# Altium PCB BLDCMOTORCONTROLLER.PcbDoc
Units mil, origin at the board's own origin, x right, y up, seen from the top; angles counter-clockwise.
Board outline 3645 x 3720 mil, 2 copper layers (Top Layer, Bottom Layer); 68 components, 47 nets, 204 pads, 0 vias.
Unrouted connection lines stored in the file: 127.
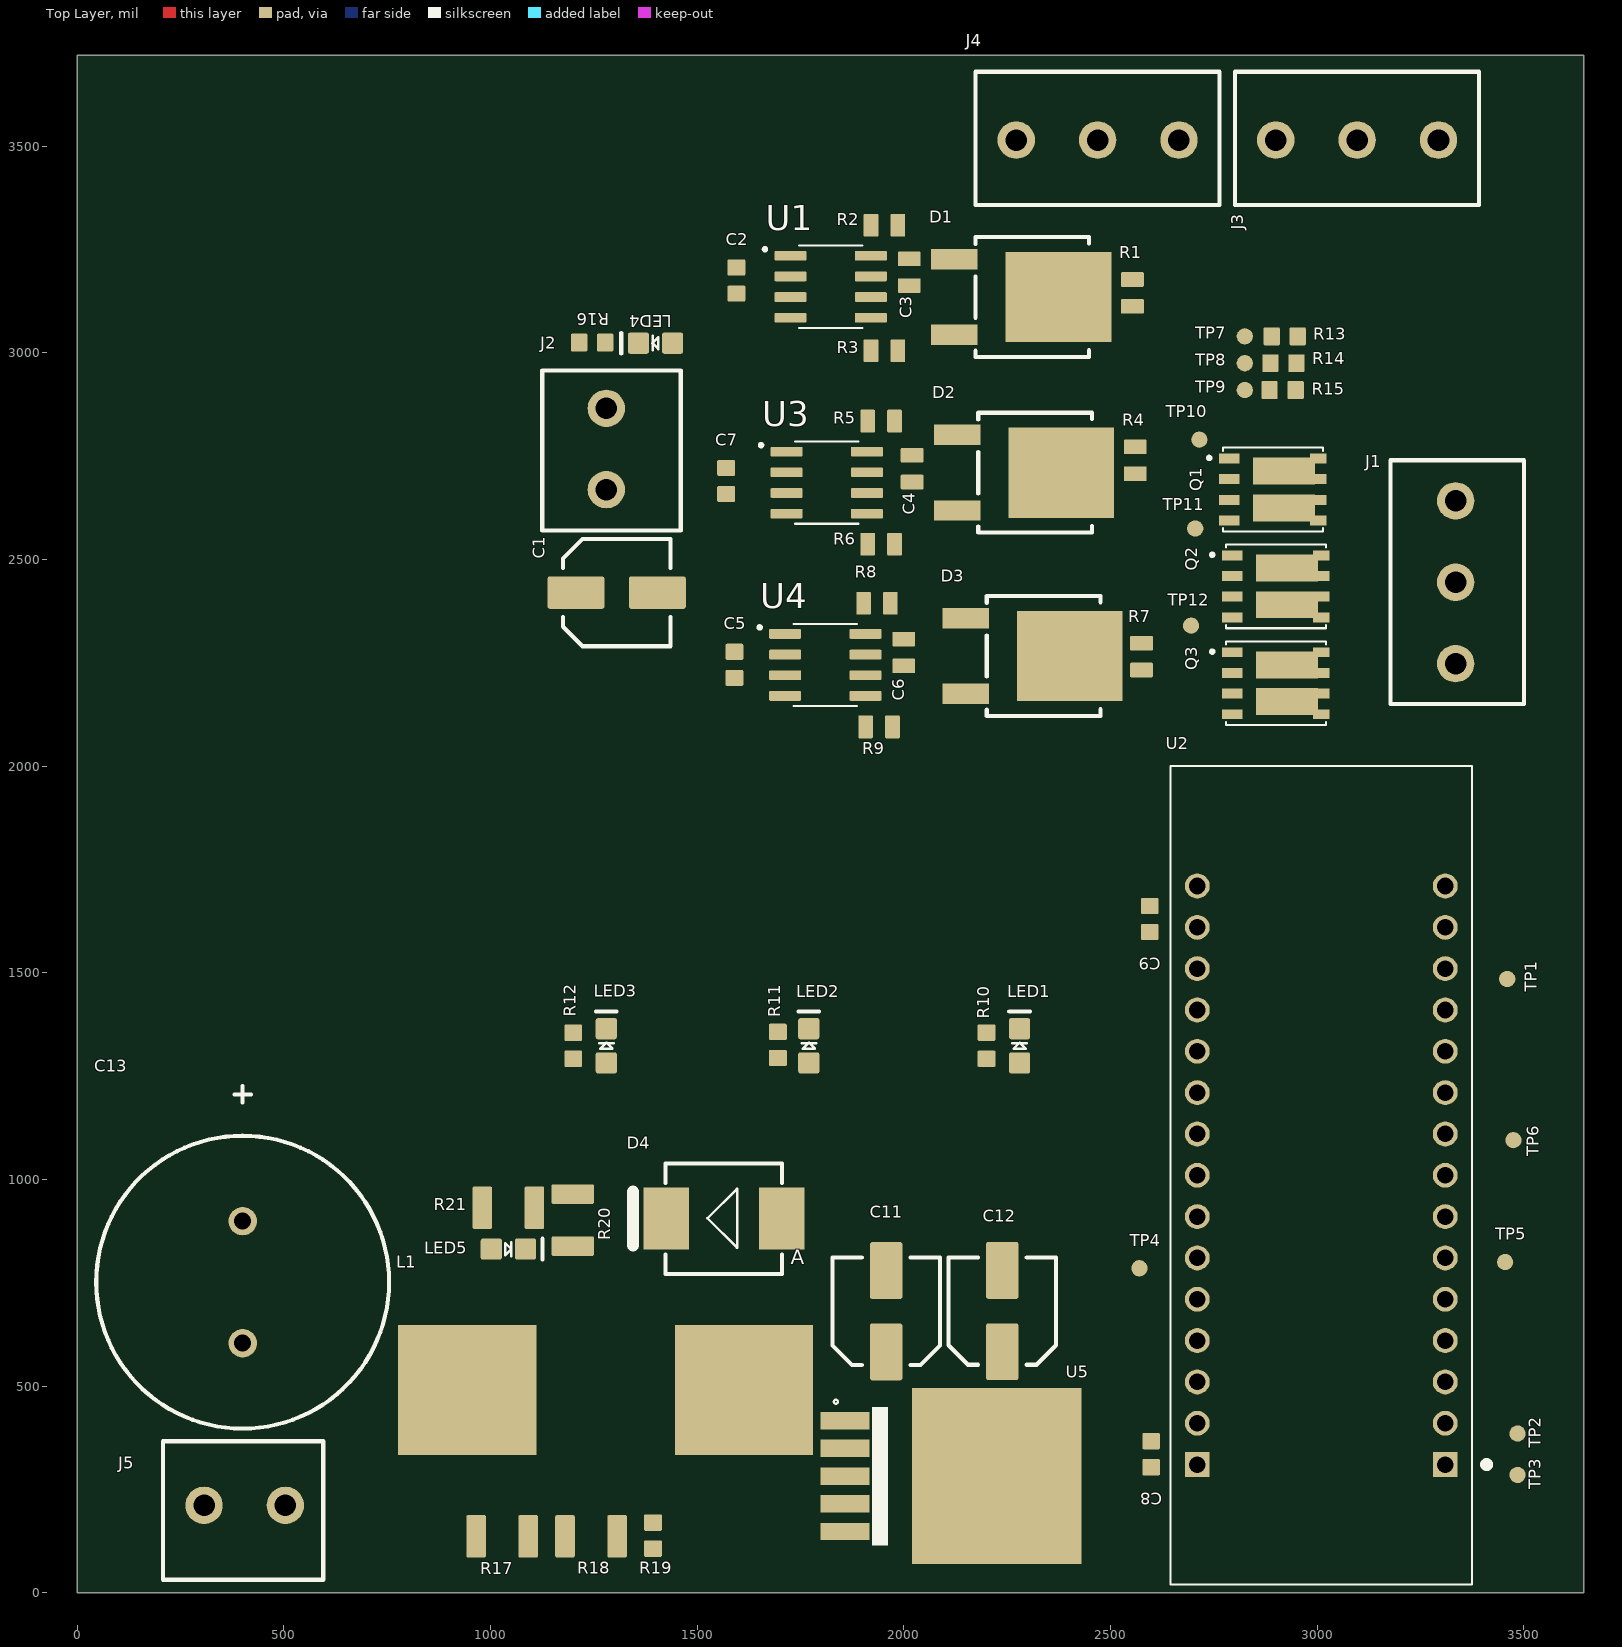
[diagram p0: Top Layer view]
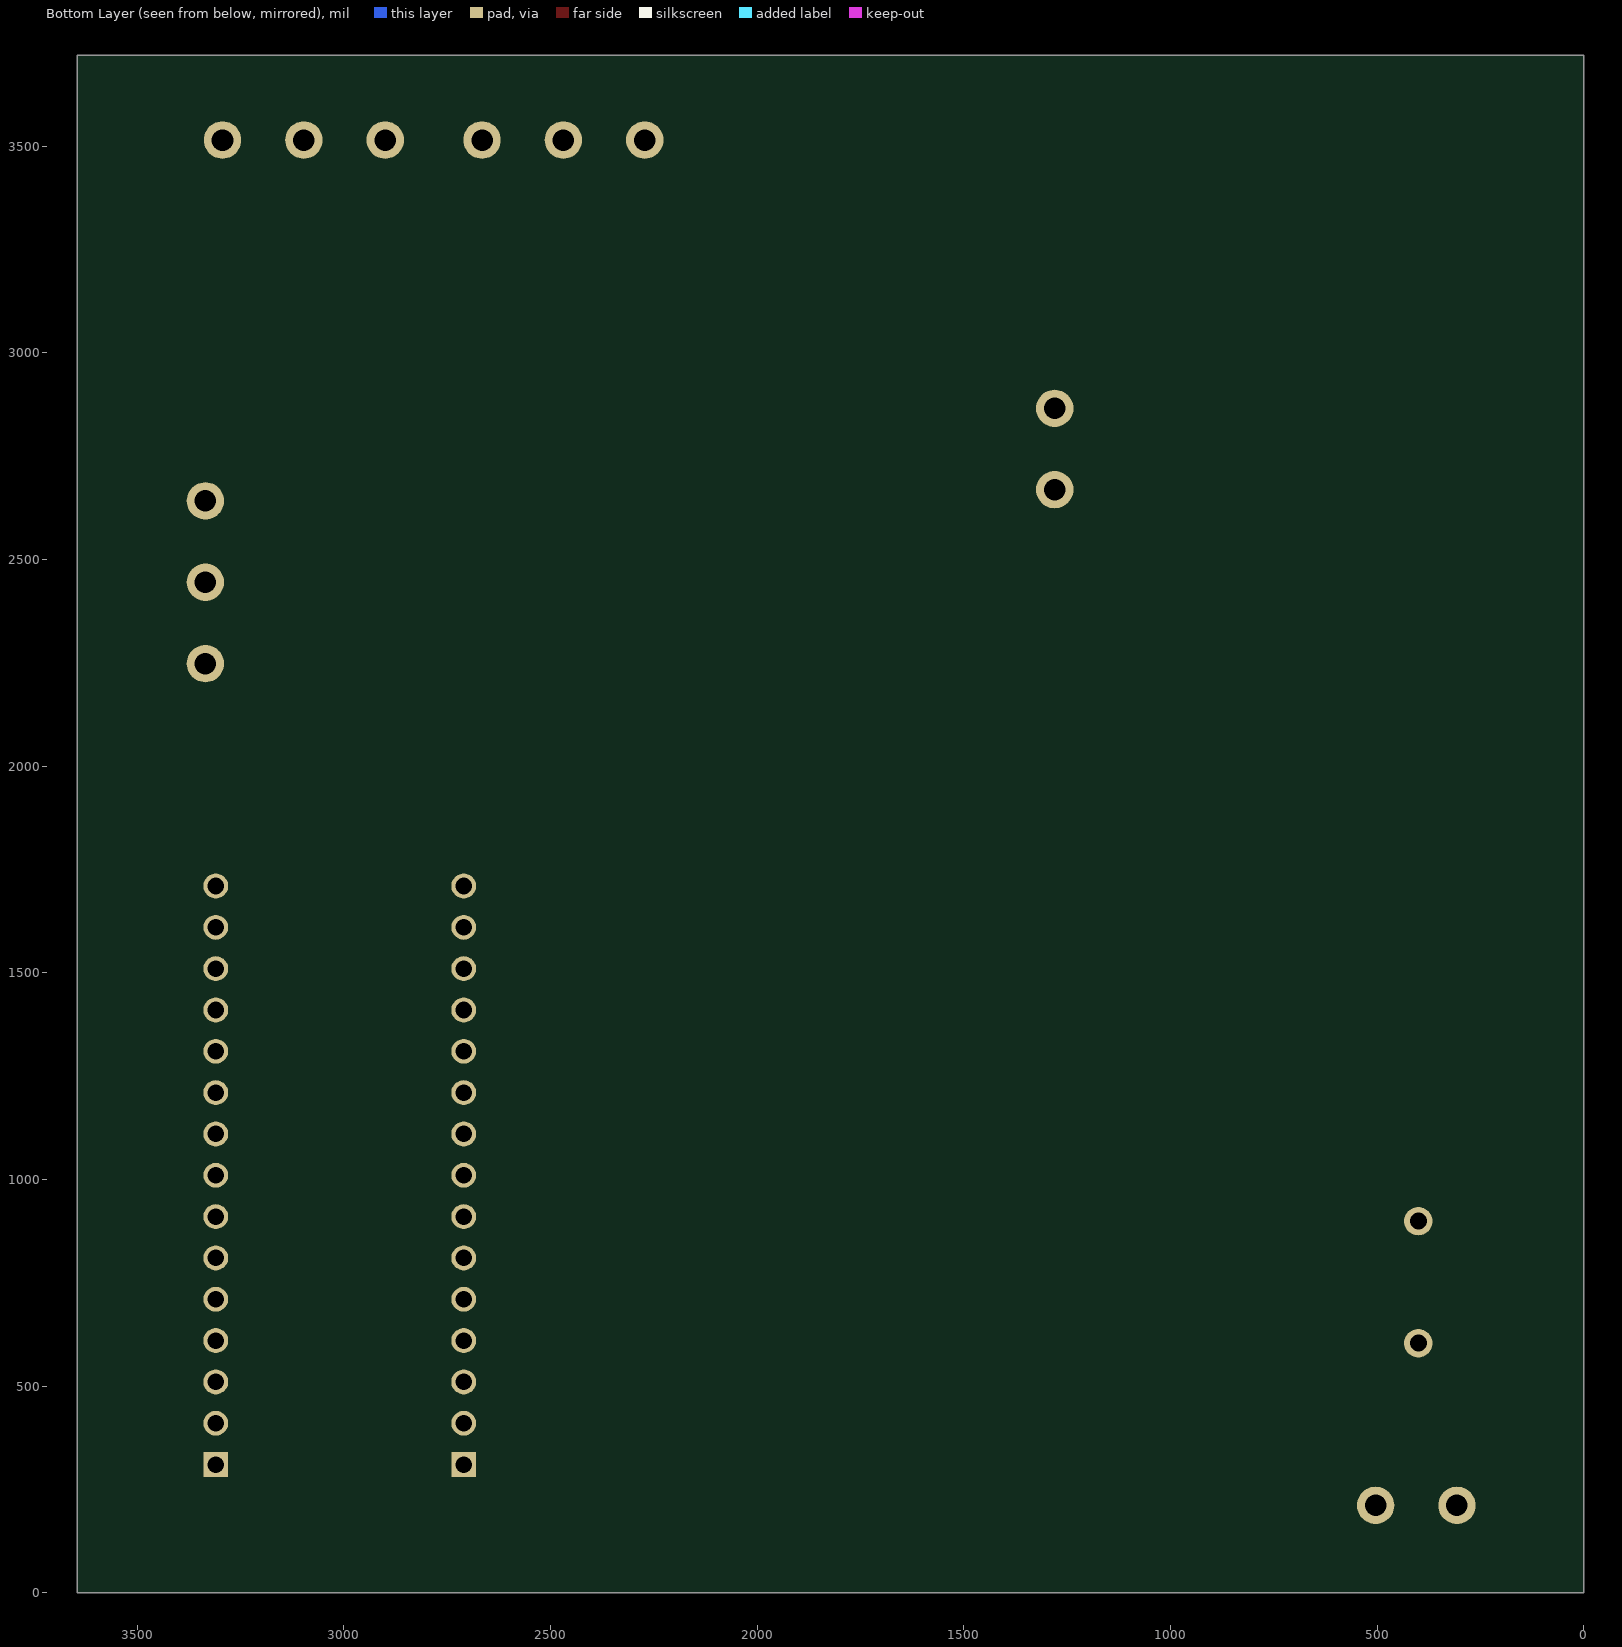
[diagram p1: Bottom Layer view, seen from below]

## Layer stack, top to bottom
Top Solder: solder mask 0.4, Solder Resist, Dk 3.5
Top Layer: signal copper 1.4
Dielectric 1: dielectric 12.6, FR-4, Dk 4.8
Bottom Layer: signal copper 1.4
Bottom Solder: solder mask 0.4, Solder Resist, Dk 3.5

## Board outline
0,0 3645,0 3645,3720 0,3720

## Design rules (kind name [scope] priority, off if disabled: settings)
Clearance [All] p1: gap=10 ignorepadtopadclearanceinfootprint=FALSE except(0: Arc-Hole Track-Hole SMDPad-Hole THPad-Hole Via-Hole Fill-Hole Poly-Hole Region-Hole Text-Hole)
PolygonConnect [All] p1: connectstyle=Relief reliefconductorwidth=10 reliefentries=4 polygonreliefangle="90 Angle" airgapwidth=10
RoomDefinition MCU [InComponentClass('MCU')] p1: confinementstyle=ConfineIn formatcopy=TRUE lockcomponents=FALSE outline 3560,5 3560,2025 2500,2025 2500,5
RoomDefinition Main [InComponentClass('Main')] p2: confinementstyle=ConfineIn formatcopy=TRUE lockcomponents=FALSE outline 1065,2015 3640,2015 3640,3715 1065,3715
RoomDefinition LEDs [InComponentClass('LEDs')] p3: confinementstyle=ConfineIn formatcopy=TRUE lockcomponents=FALSE outline 1020,1243.35 2480,1243.35 2480,1518.35 1020,1518.35
RoomDefinition Buck [InComponentClass('Buck')] p4: confinementstyle=ConfineIn formatcopy=TRUE lockcomponents=FALSE outline 0.04,6.4 2483.03,6.4 2483.03,1236.4 0.04,1236.4
RoutingVias [All] p1: holewidth=28 width=50 viastyle="Through Hole" minholewidth=28 minwidth=50 maxholewidth=28 maxwidth=50
SolderMaskExpansion [All] p1: expansion=4 istentingtop=FALSE
Width [All] p1: maxlimit=10 minlimit=10 preferedwidth=10
30 further rules are at their usual default settings.

## Classes and differential pairs
net class HI: GND "PHASE A" "PHASE B" "PHASE C" VBUS
component class MCU: C8 C9 TP1 TP2 TP3 TP4 TP5 TP6 U2
component class Main: C1 C2 C3 C4 C5 C6 C7 D1 D2 D3 J1 J2 J3 J4 LED4 Q1 Q2 Q3 R1 R2 R3 R4 R5 R6 R7 R8 R9 R13 R14 R15 R16 TP7 TP8 TP9 TP10 TP11 TP12 U1 U3 U4
component class LEDs: LED1 LED2 LED3 R10 R11 R12
component class Buck: C11 C12 C13 D4 J5 L1 LED5 R17 R18 R19 R20 R21 U5

## Components (designator, comment, footprint, x,y, rotation, side; value= is the part's Value field where it differs from the comment)
C1 "CAP_47uF_100V_ALUM" RADIAL_CORNELL_D 1305,2420 r270 top
C2 "CAP_1uF_50V_0603" CAP0603 1595,3175 r90 top value=1μF
C3 "CAP_0.1uF_100V_0805" CAP0805 2013.01,3195 r90 top value=0.1µF
C4 "CAP_0.1uF_100V_0805" CAP0805 2020,2720 r90 top value=0.1µF
C5 "CAP_1uF_50V_0603" CAP0603 1590,2245 r90 top value=1μF
C6 "CAP_0.1uF_100V_0805" CAP0805 2000,2275 r90 top value=0.1µF
C7 "CAP_1uF_50V_0603" CAP0603 1570,2690 r90 top value=1μF
C8 "CAP_0.1uF_50V_0603" CAP0603 2598.55,335 r270 top value=0.1μF
C9 "CAP_0.1uF_50V_0603" CAP0603 2595,1630 r270 top value=0.1μF
C11 "CAP_47uF_100V_ALUM" RADIAL_CORNELL_D 1957.18,681.09 r0 top
C12 "CAP_47uF_100V_ALUM" RADIAL_CORNELL_D 2238.18,681.4 r0 top
C13 "CAP_680uF_63V_ALUM" ELXZ630ELL681MM20S 400.04,751.4 r90 top value=680uF
D1 "DIO_SCHOTTKY_100V_5.5A" D-PAK 2248.01,3135 r270 top
D2 "DIO_SCHOTTKY_100V_5.5A" D-PAK 2255,2710 r270 top
D3 "DIO_SCHOTTKY_100V_5.5A" D-PAK 2275.49,2266.54 r270 top
D4 "DIO_SCHOTTKY_20V_3A" SS32 1565.04,905 r0 top
J1 "CON_3POS_SCREW_TERM" 1935174 3335,2445 r270 top
J2 "CON_2POS_SCREW_TERM" 1935161 1280,2767.36 r90 top
J3 "CON_3POS_SCREW_TERM" 1935174 3096.85,3515 r0 top
J4 "CON_3POS_SCREW_TERM" 1935174 2468.85,3515 r0 top
J5 "CON_2POS_SCREW_TERM" 1935161 405.04,211.4 r0 top
L1 "IND_330uH_6.1A" 74437529203331 1613.03,490.63 r180 top
LED1 "LED_YELLOW" LED_0805_YELLOW 2280,1323.35 r90 top
LED2 "LED_YELLOW" LED_0805_YELLOW 1770,1323.35 r90 top
LED3 "LED_YELLOW" LED_0805_YELLOW 1280,1323.35 r90 top
LED4 "LED_RED" LED_0805_RED 1399.02,3023.46 r180 top
LED5 "LED_RED" LED_0805_RED 1043.03,831.4 r0 top
Q1 "NMOS_2CH_60V_63A" "PowerPAK 8 x 8 Dual" 2892.83,2669.49 r0 top
Q2 "NMOS_2CH_60V_63A" "PowerPAK 8 x 8 Dual" 2900.12,2435.07 r0 top
Q3 "NMOS_2CH_60V_63A" "PowerPAK 8 x 8 Dual" 2900.12,2200.65 r0 top
R1 "RES_5.1Ω_0805_5%" RES0805 2553.01,3145 r270 top value=5.1Ω
R2 "RES_5.1Ω_0805_5%" RES0805 1953.01,3308.95 r0 top value=5.1Ω
R3 "RES_5.1Ω_0805_5%" RES0805 1953.01,3005 r0 top value=5.1Ω
R4 "RES_5.1Ω_0805_5%" RES0805 2560,2740 r270 top value=5.1Ω
R5 "RES_5.1Ω_0805_5%" RES0805 1945,2835 r0 top value=5.1Ω
R6 "RES_5.1Ω_0805_5%" RES0805 1945,2537.03 r0 top value=5.1Ω
R7 "RES_5.1Ω_0805_5%" RES0805 2575,2265 r270 top value=5.1Ω
R8 "RES_5.1Ω_0805_5%" RES0805 1935,2393.95 r0 top value=5.1Ω
R9 "RES_5.1Ω_0805_5%" RES0805 1940,2095 r0 top value=5.1Ω
R10 "RES_510Ω_0603_5%" RES0603 2200,1355 r270 top value=510Ω
R11 "RES_510Ω_0603_5%" RES0603 1695,1357.01 r270 top value=510Ω
R12 "RES_510Ω_0603_5%" RES0603 1200,1355 r270 top value=510Ω
R13 "RES_10kΩ_0603_5%" RES0603 2890,3040 r0 top value=10kΩ
R14 "RES_10kΩ_0603_5%" RES0603 2887.01,2975 r0 top value=10kΩ
R15 "RES_10kΩ_0603_5%" RES0603 2885,2910 r0 top value=10kΩ
R16 "RES_20kΩ_0603_1%" RES0603 1214.33,3025 r0 top value=20kΩ
R17 "RES_4.3kΩ_1210_5%" RES1210 1028.03,136.4 r180 top value=4.3kΩ
R18 "RES_4.3kΩ_1210_5%" RES1210 1243.03,136.4 r180 top value=4.3kΩ
R19 "RES_1kΩ_0603_5%" RES0603 1393.03,106.4 r90 top value=1kΩ
R20 "RES_4.3kΩ_1210_5%" RES1210 1198.84,901.4 r270 top value=4.3kΩ
R21 "RES_4.3kΩ_1210_5%" RES1210 1043.03,931.4 r0 top value=4.3kΩ
TP1 "TESTPOINT_1MM_CIRCLE" TESTPOINT_CIRCLE_1MM 3460,1485 r180 top
TP2 "TESTPOINT_1MM_CIRCLE" TESTPOINT_CIRCLE_1MM 3485,385 r180 top
TP3 "TESTPOINT_1MM_CIRCLE" TESTPOINT_CIRCLE_1MM 3485,285 r180 top
TP4 "TESTPOINT_1MM_CIRCLE" TESTPOINT_CIRCLE_1MM 2570,785 r180 top
TP5 "TESTPOINT_1MM_CIRCLE" TESTPOINT_CIRCLE_1MM 3455,800 r180 top
TP6 "TESTPOINT_1MM_CIRCLE" TESTPOINT_CIRCLE_1MM 3475,1095 r180 top
TP7 "TESTPOINT_1MM_CIRCLE" TESTPOINT_CIRCLE_1MM 2825,3040 r180 top
TP8 "TESTPOINT_1MM_CIRCLE" TESTPOINT_CIRCLE_1MM 2825,2975 r180 top
TP9 "TESTPOINT_1MM_CIRCLE" TESTPOINT_CIRCLE_1MM 2825,2910 r180 top
TP10 "TESTPOINT_1MM_CIRCLE" TESTPOINT_CIRCLE_1MM 2715,2790 r90 top
TP11 "TESTPOINT_1MM_CIRCLE" TESTPOINT_CIRCLE_1MM 2705,2575 r180 top
TP12 "TESTPOINT_1MM_CIRCLE" TESTPOINT_CIRCLE_1MM 2695,2340 r315 top
U1 "LM5109BMAX/NOPBCT-ND" SOIC127P599X175-8N 1823.01,3160 r0 top
U2 "STM32F042K6 NUCLEO" NUCLEO-F042K6 3010,1010 r180 top
U3 "LM5109BMAX/NOPBCT-ND" SOIC127P599X175-8N 1813.46,2685.98 r0 top
U4 "LM5109BMAX/NOPBCT-ND" SOIC127P599X175-8N 1810,2245 r0 top
U5 "BUCK_ADJ_4_57_V" D2PAK-5 2035.42,282.07 r0 top

## Footprints (in the part's own frame and the unit in brackets; to place one, negate y for a bottom-side part, rotate by r counter-clockwise, add the part's x,y. Pads: shape width x height; smd on the part's side, far side on the other; paste and mask are expansions set on the pad)
1935161 [mm] "TERM BLK 2POS SIDE ENTRY 5MM PCB"
  round 2.3 hole 1.325: 1(-2.5,0) 2(2.5,0)
  silkscreen extent -5.01,-4.57 4.83,3.94, body extent -5.01,-5.06 5.39,3.94, height 11.41
1935174 [mm] "5 MM PITCH"
  round 2.3 hole 1.325: 1(-5,0) 2(0,0) 3(5,0)
  silkscreen extent -7.5,-4 7.48,4.2, body extent -8.09,-4 7.48,5, height 11.41
74437529203331 [mm]
  rect 8.5x8 smd: 1(0,0) 2(17,0)
  body extent -4.15,-6.74 20.75,6.74, height 5.94
CAP0603 [mm]
  rrect20% 1x1.1 smd: 1(-0.8,0) 2(0.8,0)
  body extent -0.87,-0.48 0.88,0.48, height 0.87
CAP0805 [mm] "Chip Capacitor, Body 2.0x1.2mm, Height 0.45mm, IPC Medium Density"
  rrect15% 0.9x1.4 smd: 1(-0.825,0) 2(0.825,0)
  body extent -1.1,-0.73 1.1,0.73, height 1.39
D2PAK-5 [mil]
  rect 118.11x42 smd: 1(-178,134) 2(-178,67) 3(-178,0) 4(-178,-67) 5(-178,-134)
  rect 409.84x425.2 smd: 6(189.37,0)
  silkscreen extent -205,-167 -74,185, body extent -221,-200 426,200, height 175
D-PAK [mm] "TO-252AA"
  rect 5.55x6.5 smd: 1(0,3.2)
  rect 1.25x2.85 smd: 2(-2.325,-3.2) 3(2.325,-3.2)
  silkscreen extent -3.68,-1.91 3.68,5.08, body extent -3.27,-4.08 3.27,5.8, height 2.64
ELXZ630ELL681MM20S [mm] "CAP ALUM 680UF 20% 63V RADIAL"
  round 1.75 hole 1.05: 1(-3.75,0) 2(3.75,0)
  silkscreen extent -9,-9 12.05,9
LED_0805_RED [mm] "SMD, 2-Leads, Body 2x1.25mm"
  rrect20% 1.3x1.3 smd: 1(-1.05,0) 2(1.05,0)
  silkscreen extent -0.18,-0.63 2.11,0.64, body extent -1,-0.62 1,0.63, height 1.12
LED_0805_YELLOW [mm] "SMD, 2-Leads, Body 2x1.25mm"
  rrect20% 1.3x1.3 smd: 1(-1.05,0) 2(1.05,0)
  silkscreen extent -0.18,-0.63 2.11,0.64, body extent -1,-0.62 1,0.63, height 1.12
NUCLEO-F042K6 [mm]
  rect 1.53x1.53 hole 1.02: 1(-7.62,17.78) 16(7.62,17.78)
  round 1.53 hole 1.02: 2(-7.62,15.24) 3(-7.62,12.7) 4(-7.62,10.16) 5(-7.62,7.62) 6(-7.62,5.08) 7(-7.62,2.54) 8(-7.62,0) 9(-7.62,-2.54) 10(-7.62,-5.08) 11(-7.62,-7.62) 12(-7.62,-10.16) 13(-7.62,-12.7) 14(-7.62,-15.24) 15(-7.62,-17.78) 17(7.62,15.24) 18(7.62,12.7) 19(7.62,10.16) 20(7.62,7.62) 21(7.62,5.08) 22(7.62,2.54) 23(7.62,0) 24(7.62,-2.54) 25(7.62,-5.08) 26(7.62,-7.62) 27(7.62,-10.16) 28(7.62,-12.7) 29(7.62,-15.24) 30(7.62,-17.78)
  silkscreen extent -10.36,-25.14 9.27,25.15
"PowerPAK 8 x 8 Dual" [mm]
  rect 1.27x0.61 smd: 1(-2.67,1.905) 2(-2.67,0.635) 3(-2.67,-0.635) 4(-2.67,-1.905)
  rect 3.81x1.65 smd: 5(0.69,1.13) 6(0.69,-1.13)
  rect 1.02x0.61 smd: 5(2.795,0.635) 5(2.795,1.905) 6(2.795,-1.905) 6(2.795,-0.635)
  silkscreen extent -4.01,-2.58 3.08,2.58, body extent -3.2,-2.58 2.95,2.58, height 1.12
RADIAL_CORNELL_D [mm] "Size D radial surface mount capacitor"
  rrect15% 2x3.5 smd: 1(0,-2.5) 2(0,2.5)
  silkscreen extent -3.3,-3.3 3.3,3.3, body extent -3.3,-3.62 3.3,3.67, height 5.9
RES0603 [mm] "Chip Resistor, Body 1.6x0.8mm, IPC Medium Density"
  rrect15% 1x1.1 smd: 1(0,0) 2(1.6,0)
  body extent 0,-0.4 1.6,0.4, height 0.46
RES0805 [mm] "Chip Resistor, 2-Leads, Body 2.00x1.25mm, IPC High Density"
  rrect15% 0.9x1.4 smd: 1(-0.825,0) 2(0.825,0)
  body extent -1,-0.62 1,0.63, height 0.61
RES1210 [mm] "Chip Resistor, Body 3.20x2.50mm"
  rrect15% 1.2x2.6 smd: 1(-1.6,0) 2(1.6,0)
  body extent -1.6,-1.25 1.6,1.25, height 0.6
SOIC127P599X175-8N [mm]
  rrect25% 1.97x0.6 smd: 1(-2.47,1.905) 2(-2.47,0.635) 3(-2.47,-0.635) 4(-2.47,-1.905) 5(2.47,-1.905) 6(2.47,-0.635) 7(2.47,0.635) 8(2.47,1.905)
  silkscreen extent -4.14,-2.52 1.95,2.52, body extent -3,-2.45 3,2.45, height 1.75
SS32 [mil] "Schottky Diode"
  rect 110x150 smd: 1(-139.96,0) 2(139.96,0)
  silkscreen extent -220,-134 140,134, body extent -142,-134 140,134, height 95
TESTPOINT_CIRCLE_1MM [mm]
  round 1 smd: 1(0,0)

## Part data
C1 C11 C12: "Aluminum Electrolytic Capacitor, Polarized, Aluminum (wet), 100V, 20% +Tol, 20% -Tol, 47uF, Surface Mount, 5454", Capacitance=47uF, Capacitor Type=Aluminium, Leakage Current=47uA, Manufacturer=Nichicon, Manufacturer Part Number=UCD2A470MNQ1MS, Max Operating Temperature=105°C, Min Operating Temperature=-55°C, Negative Tolerance=20%, Package Shape=Cylindrical, Package Style=SMTMeter, Rated DC Voltage (URdc)=100V, Ripple Current=250mA, Supplier Part Number 1=493-6201-1-ND, Category="Aluminum Electrolytic Capacitors", ComponentLink1Description=https://datasheet.ciiva.com:443/pdfs/VipMasterIC/IC/NICH/NICH-S-A0003527725/NICH-S-A0003527725-1.pdf?src-supplier=IHS+Markit, ComponentLink1URL=https://datasheet.ciiva.com:443/pdfs/VipMasterIC/IC/NICH/NICH-S-A0003527725/NICH-S-A0003527725-1.pdf?src-supplier=IHS+Markit, ComponentLink2Description=https://datasheet.ciiva.com/11776/0900766b80ebdadd-11776792.pdf?src-supplier=RSComponents, ComponentLink2URL=https://datasheet.ciiva.com/11776/0900766b80ebdadd-11776792.pdf?src-supplier=RSComponents, ComponentLink3Description=https://datasheet.ciiva.com/30526/getdatasheetpartid-513218-30526979.pdf?src-supplier=Verical, ComponentLink3URL=https://datasheet.ciiva.com/30526/getdatasheetpartid-513218-30526979.pdf?src-supplier=Verical, ComponentLink4Description=https://datasheet.ciiva.com/16389/e-cd-16389182.pdf?src-supplier=Future+Electronics, ComponentLink4URL=https://datasheet.ciiva.com/16389/e-cd-16389182.pdf?src-supplier=Future+Electronics, ComponentLink5Description=https://datasheet.ciiva.com/17523/e-cd-17523974.pdf?src-supplier=Avnet+Europe, ComponentLink5URL=https://datasheet.ciiva.com/17523/e-cd-17523974.pdf?src-supplier=Avnet+Europe, ComponentLink6Description=https://datasheet.ciiva.com/6326/e-cd-6326630.pdf?src-supplier=Digi-Key, ComponentLink6URL=https://datasheet.ciiva.com/6326/e-cd-6326630.pdf?src-supplier=Digi-Key, ComponentLink7Description=https://datasheet.ciiva.com/6326/e-cd-6326632.pdf?src-supplier=Digi-Key, ComponentLink7URL=https://datasheet.ciiva.com/6326/e-cd-6326632.pdf?src-supplier=Digi-Key, ComponentLink8Description=https://datasheet.ciiva.com/6326/e-cd-6326634.pdf?src-supplier=Digi-Key, ComponentLink8URL=https://datasheet.ciiva.com/6326/e-cd-6326634.pdf?src-supplier=Digi-Key, Dielectric Material=Aluminium, Height=13.5mm, JESD-609 Code=e3, Length=14.6mm, Mount="Surface Mount", Number of Pins=2, Packaging="Tape and Reel", Polarity=Polarized, Positive Tolerance=20%, Pricing 1="1=2.15000, 10=1.69800, 50=1.47140, 100=1.27330 (USD)", REACH SVHC=Yes, RoHS=Yes, RoHS Compliant=Yes, Size Code=7575, Stock 1=515, Supplier 1=Digi-Key, Tan Delta=0.07, Terminal Finish=Copper, Termination=Flat, Voltage Rating=100V, Width=13.6mm
C2 C5 C7: "CAP CER 1UF 50V X6S 0603", Dielectric=X6S, Manufacturer 1="TDK Corporation", Manufacturer Part Number 1=C1608X6S1H105K080AC, Supplier Part Number 1=445-7424-1-ND, Voltage Rating=50V, Supplier 1=Digi-Key
C3 C4 C6: "CAP CER 0.1UF 100V X7R 0805", Manufacturer 1="TDK Corporation", Manufacturer Part Number 1=C2012X7R2A104K125AA, Package=0805, Supplier Part Number 1=445-1418-1-ND, Voltage Rating=100V, Supplier 1=Digi-Key
C8 C9: "CAP CER 0.1UF 50V X7R 0603", Dielectric=X7R, Manufacturer 1=Yageo, Manufacturer Part Number 1=CC0603KRX7R9BB104, Package/Footprint=0603, Supplier Part Number 1=311-1344-1-ND, Voltage Rating=50V, Mounting Type=SMD, Supplier 1=Digi-Key
C13: "CAP ALUM 680UF 20% 63V RADIAL", Manufacturer 1="United Chemi-Con", Manufacturer Part Number 1=ELXZ630ELL681MM20S, Supplier Part Number 1=565-2050-ND, Voltage=63V, Mounting Type=SMD, Supplier 1=Digi-Key, Voltage Rating=63V
D1 D2 D3: "DIODE SCHOTTKY 100V 5.5A DPAK", Manufacturer 1="Vishay General Semiconductor - Diodes Division", Manufacturer Part Number 1=VS-50WQ10FN-M3, Package/Footprint="TO-252-3, DPak (2 Leads + Tab), SC-63", Supplier Part Number 1=VS-50WQ10FN-M3-ND, Mounting Type=SMD, Supplier 1=Digi-Key, Vr (Max)=100V
D4: "DIODE SCHOTTKY 20V 3A SMC", Manufacturer 1="ON Semiconductor / Fairchild", Manufacturer Part Number 1=SS32, Supplier Part Number 1=SS32CT-ND, Part number=SS32, Supplier 1=Digi-Key
J1 J3 J4: "TERM BLK 3POS SIDE ENTRY 5MM", Current Rating=17.5A, Manufacturer 1="Phoenix Contact", Manufacturer Part Number 1=1935174, Package/Footprint=TH, Supplier Part Number 1=277-1578-ND, Voltage Rating=250V, Mounting Type=TH, Orientation=Straight, Pitch=5mm, Supplier 1=Digi-Key
J2 J5: "TERM BLK 2POS SIDE ENTRY 5MM", Manufacturer 1="Phoenix Contact", Manufacturer Part Number 1=1935161, Package/Footprint=SMD, Supplier Part Number 1=277-1667-ND, Mounting Type=TH, Supplier 1=Digi-Key
L1: "General Purpose Inductor", Current Rating=6.1A, Inductance=330uH, Inductor Type="GENERAL PURPOSE INDUCTOR", Manufacturer="Wurth Electronics", Manufacturer Part Number=74437529203331, Supplier Part Number 1=732-11718-ND, Category="Fixed Inductors", ComponentLink1Description=https://datasheet.ciiva.com:443/pdfs/VipMasterIC/IC/MIDC/MIDC-S-A0004023785/MIDC-S-A0004024368-1.pdf?src-supplier=IHS+Markit, ComponentLink1URL=https://datasheet.ciiva.com:443/pdfs/VipMasterIC/IC/MIDC/MIDC-S-A0004023785/MIDC-S-A0004024368-1.pdf?src-supplier=IHS+Markit, ComponentLink2Description=https://katalog.we-online.de/pbs/datasheet/74437529203331.pdf?src-supplier=Digi-Key, ComponentLink2URL=https://katalog.we-online.de/pbs/datasheet/74437529203331.pdf?src-supplier=Digi-Key, Pricing 1="1=8.85000, 50=7.76200, 100=6.93000, 270=6.30000 (USD)", REACH SVHC=Yes, RoHS=Yes, RoHS Compliant=Yes, Stock 1=443, Supplier 1=Digi-Key
LED1 LED2 LED3: "LED YELLOW DIFFUSED 0805 SMD", Forward Voltage Drop=2.2V, Manufacturer 1=OSRAM, Manufacturer Part Number 1="LY R976-PS-36", Package="0805 (2012 Metric)", Supplier Part Number 1=475-2560-1-ND, Supplier 1=Digi-Key
LED4 LED5: "LED RED DIFFUSED 0805 SMD", Forward Voltage Drop=2V, Manufacturer 1=OSRAM, Manufacturer Part Number 1="LS R976-NR-1", Package/Footprint=0805, Supplier Part Number 1=475-1278-1-ND, Mounting Type=SMD, Supplier 1=Digi-Key
Q1 Q2 Q3: "MOSFET 2 N-CH 60V POWERPAK8X8", Manufacturer=Vishay, Manufacturer Part Number=SQJQ960EL-T1_GE3, Supplier Part Number 1=SQJQ960EL-T1_GE3CT-ND, Category=MOSFETs, ComponentLink1Description=http://www.vishay.com/docs/76020/sqjq960el.pdf?src-supplier=Digi-Key, ComponentLink1URL=http://www.vishay.com/docs/76020/sqjq960el.pdf?src-supplier=Digi-Key, Pricing 1="1=2.32000, 10=2.08400, 100=1.67520, 500=1.37638, 1000=1.17975 (USD)", RoHS=No, Stock 1=848, Supplier 1=Digi-Key
R1 R2 R3 R4 R5 R6 R7 R8 R9: "RES 5.1 OHM 5% 1/8W 0805", Manufacturer 1=Panasonic, Manufacturer Part Number 1=ERJ-6GEYJ5R1V, Supplier Part Number 1=P5.1ACT-ND, Supplier 1=Digi-Key
R10 R11 R12: "RES 510 OHM 5% 1/10W 0603", Manufacturer 1="Vishay Dale", Manufacturer Part Number 1=CRCW0603510RJNEA, Supplier Part Number 1=541-510GCT-ND, Supplier 1=Digi-Key
R13 R14 R15: "RES 10K OHM 5% 1/10W 0603", Manufacturer 1=Yageo, Manufacturer Part Number 1=RC0603JR-0710KL, Package=0603, Supplier Part Number 1=311-10KGRCT-ND, Mounting Type=SMD, Supplier 1=Digi-Key
R16: "RES 20K OHM 1% 1/10W 0603", Manufacturer 1=Yageo, Manufacturer Part Number 1=RC0603FR-0720KL, Supplier Part Number 1=311-20.0KHRCT-ND, Supplier 1=Digi-Key
R17 R18 R20 R21: "RES 4.3K OHM 5% 1/2W 1210", Manufacturer 1=Panasonic, Manufacturer Part Number 1=ERJ-14YJ432U, Package=1210, Supplier Part Number 1=P4.3KVCT-ND, Tolerance=5%, Mounting Type=SMD, Supplier 1=Digi-Key
R19: "RES 1K OHM 5% 1/10W 0603", Manufacturer 1=Yageo, Manufacturer Part Number 1=RC0603JR-071KL, Package=0603, Supplier Part Number 1=311-1.0KGRCT-ND, Mounting Type=SMD, Supplier 1=Digi-Key
TP1 TP2 TP3 TP4 TP5 TP6 TP7 TP8 TP9 TP10 TP11 TP12: "TESTPOINT 1MM CIRCLE"
U1 U3 U4: library part IC_GATE_DRIVER_HALF_BRIDGE, "Half Bridge Based MOSFET Driver, 1A, PDSO8", Manufacturer="TI National Semiconductor", Manufacturer Part Number=LM5109BMAX/NOPB, Max Operating Temperature=125°C, Max Supply Voltage=14V, Min Operating Temperature=-40°C, Min Supply Voltage=8V, Package Body Material=Plastic, Package Code=SOP, Package Equivalence Code=SOP8,.25, Package Shape=Rectangular, Package Style="SMALL OUTLINEMeter", Peak Reflow Temperature (Cel)=260°C, Power Supplies=12V, Temperature Grade=AUTOMOTIVE, Category="Gate Drivers", ComponentLink1Description=https://www.ti.com:443/lit/ds/symlink/lm5109b.pdf?src-supplier=IHS+Markit, ComponentLink1URL=https://www.ti.com:443/lit/ds/symlink/lm5109b.pdf?src-supplier=IHS+Markit, ComponentLink2Description=https://datasheet.ciiva.com/6609/lm5109b-6609744.pdf?src-supplier=Digi-Key, ComponentLink2URL=https://datasheet.ciiva.com/6609/lm5109b-6609744.pdf?src-supplier=Digi-Key, ComponentLink3Description=https://datasheet.ciiva.com/41458/001014174-da-01-en-ic-dvr-half-b-lm5109bmax-nopb-soic-8-tid-41458460.pdf?src-supplier=Conrad, ComponentLink3URL=https://datasheet.ciiva.com/41458/001014174-da-01-en-ic-dvr-half-b-lm5109bmax-nopb-soic-8-tid-41458460.pdf?src-supplier=Conrad, ComponentLink4Description=https://datasheet.ciiva.com/6609/lm5109b-6609743.pdf?src-supplier=Digi-Key, ComponentLink4URL=https://datasheet.ciiva.com/6609/lm5109b-6609743.pdf?src-supplier=Digi-Key, Height - Seated (Max)=1.75mm, High Side Driver=Yes, Interface IC Type="HALF BRIDGE BASED MOSFET DRIVER", JESD-30 Code=R-PDSO-G8, JESD-609 Code=e3, Length=4.9mm, Moisture Sensitivity Level=1, Number of Functions=1, Number of Pins=8, Pricing 1="1=1.05000, 10=0.93500, 25=0.88760, 100=0.72900, 250=0.68144, 500=0.60218, 1000=0.52325 (USD)", Qualification Status="Not Qualified", REACH SVHC=Yes, RoHS=Yes, RoHS Compliant=Yes, Stock 1=42623, Supplier 1=Digi-Key, Supplier Part Number 1=LM5109BMAX/NOPBCT-ND, Supply Voltage-Nom=12V, Surface Mount=Yes, Terminal Finish=Tin, Terminal Form="Gull Wing", Terminal Pitch=1.27mm, Terminal Position=DUAL, Turn-Off Delay Time=0.056us, Turn-On Delay Time=0.056us, Width=3.9mm
U2: library part STM32F042K6-NUCLEO, "STM32 Nucleo-32 development board with STM32F042K6 MCU, supports Arduino connectivity", Manufacturer=STMicroelectronics, Manufacturer Part Number=NUCLEO-F042K6, Supplier Part Number 1=497-15980-ND, Category="Embedded Processors and Controllers", ComponentLink1Description=http://www.farnell.com/datasheets/1966773.pdf?src-supplier=Farnell, ComponentLink1URL=http://www.farnell.com/datasheets/1966773.pdf?src-supplier=Farnell, ComponentLink2Description=http://www.st.com/content/ccc/resource/technical/document/data_brief/b1/d8/13/d4/b0/b7/4b/6e/DM00214578.pdf/files/DM00214578.pdf/jcr:content/translations/en.DM00214578.pdf?src-supplier=Digi-Key, ComponentLink2URL=http://www.st.com/content/ccc/resource/technical/document/data_brief/b1/d8/13/d4/b0/b7/4b/6e/DM00214578.pdf/files/DM00214578.pdf/jcr:content/translations/en.DM00214578.pdf?src-supplier=Digi-Key, ComponentLink3Description=http://www.st.com/st-web-ui/static/active/en/resource/technical/document/user_manual/DM00119724.pdf?s_searchtype=keyword&src-supplier=Avnet, ComponentLink3URL=http://www.st.com/st-web-ui/static/active/en/resource/technical/document/user_manual/DM00119724.pdf?s_searchtype=keyword&src-supplier=Avnet, ComponentLink4Description=http://www.farnell.com/datasheets/1966773.pdf?src-supplier=Element14, ComponentLink4URL=http://www.farnell.com/datasheets/1966773.pdf?src-supplier=Element14, ComponentLink5Description=http://www.st.com/st-web-ui/static/active/en/resource/technical/document/user_manual/DM00119724.pdf?s_searchtype=keyword&src-supplier=Avnet+Asia, ComponentLink5URL=http://www.st.com/st-web-ui/static/active/en/resource/technical/document/user_manual/DM00119724.pdf?s_searchtype=keyword&src-supplier=Avnet+Asia, Pricing 1="1=10.99000 (USD)", RoHS=Yes, Stock 1=10, Supplier 1=Digi-Key
U5: "Switching Regulator, Voltage-mode, 7.5A, 63kHz Switching Freq-Max, BIPolar, PSSO5", Manufacturer="TI National Semiconductor", Manufacturer Part Number=LM2576HVS-ADJ/NOPB, Max Input Voltage=60V, Max Operating Temperature=125°C, Max Output Current=7.5A, Min Input Voltage=8V, Min Operating Temperature=-40°C, Nominal Input Voltage=12V, Package Body Material=Plastic, Package Code=TO-263, Package Equivalence Code=SMSIP5H,.6,67TB, Package Shape=Rectangular, Package Style="SMALL OUTLINEMeter", Peak Reflow Temperature (Cel)=245°C, Supplier Part Number 1=LM2576HVS-ADJ/NOPB-ND, Switching Frequency-Max=63kHz, Temperature Grade=AUTOMOTIVE, Time @ Peak Reflow Temperature-Max (s)=30s, Analog IC - Other Type="SWITCHING REGULATOR", Category="Power Supply Modules", ComponentLink1Description=https://datasheet.ciiva.com:443/pdfs/VipMasterIC/IC/NATL/NATLE100002/NATLS13855-1.pdf?src-supplier=IHS+Markit, ComponentLink1URL=https://datasheet.ciiva.com:443/pdfs/VipMasterIC/IC/NATL/NATLE100002/NATLS13855-1.pdf?src-supplier=IHS+Markit, ComponentLink2Description=https://datasheet.ciiva.com/27055/1992558-27055825.pdf?src-supplier=Jameco, ComponentLink2URL=https://datasheet.ciiva.com/27055/1992558-27055825.pdf?src-supplier=Jameco, ComponentLink3Description=https://datasheet.ciiva.com/14150/dznatsemico-schaltr-lm2576-en-14150697.pdf?src-supplier=Distrelec, ComponentLink3URL=https://datasheet.ciiva.com/14150/dznatsemico-schaltr-lm2576-en-14150697.pdf?src-supplier=Distrelec, ComponentLink4Description=https://datasheet.ciiva.com/15112/getdatasheetpartid-55583-15112655.pdf?src-supplier=Verical, ComponentLink4URL=https://datasheet.ciiva.com/15112/getdatasheetpartid-55583-15112655.pdf?src-supplier=Verical, ComponentLink5Description=https://datasheet.ciiva.com/16466/lm2576-16466300.pdf?src-supplier=Avnet+Asia, ComponentLink5URL=https://datasheet.ciiva.com/16466/lm2576-16466300.pdf?src-supplier=Avnet+Asia, ComponentLink6Description=https://datasheet.ciiva.com/6596/lm2576hv-6596079.pdf?src-supplier=Digi-Key, ComponentLink6URL=https://datasheet.ciiva.com/6596/lm2576hv-6596079.pdf?src-supplier=Digi-Key, ComponentLink7Description=https://datasheet.ciiva.com/22669/1849802-22669437.pdf?src-supplier=Element14, ComponentLink7URL=https://datasheet.ciiva.com/22669/1849802-22669437.pdf?src-supplier=Element14, Control Mode=VOLTAGE-MODE, Control Technique="PULSE WIDTH MODULATION", Height - Seated (Max)=4.8mm, JESD-30 Code=R-PSSO-G5, JESD-609 Code=e3, Length=10.16mm, Moisture Sensitivity Level=3, Number of Functions=1, Number of Pins=5, Pricing 1="1=9.24000, 10=8.34300, 25=7.95520, 100=6.90760, 250=6.59712, 500=6.40676 (USD)", Qualification Status="Not Qualified", REACH SVHC="No SVHC", RoHS=Yes, RoHS Compliant=Yes, Stock 1=1907, Supplier 1=Digi-Key, Surface Mount=Yes, Switcher Configuration=BUCK, Technology=BIPOLAR, Terminal Finish=Tin, Terminal Form="Gull Wing", Terminal Pitch=1.7mm, Terminal Position=SINGLE, Width=8.635mm

## Nets (pads, with @x,y where several pads share a name; then routed paths per layer and width w, separated by ;. In a path a pad name is that pad's centre, name@x,y a point inside that pad or via, vN(x,y) a via of type N, cw(c..) or ccw(c..) an arc to the next point about the centre after c; other vN are vias at no path point)
3V3: C9.2 U2.28 U2.29
5V0: J4.2 U2.19
12V: C2.2 C5.2 C7.2 C8.2 C13.1 J4.1 J5.1 L1.2 LED5.1 R1.1 R4.1 R7.1 R17.2 U1.1 U2.16 U3.1 U4.1
GND: C1.2 C2.1 C5.1 C7.1 C8.1 C9.1 C11.2 C12.2 C13.2 D4.2 J2.2 J4.3 J5.2 Q1.3 Q2.3 Q3.3 R10.2 R11.2 R12.2 R13.1 R14.1 R15.1 R16.1 R19.1 R21.1 U1.4 U2.4 U2.17 U3.4 U4.4 U5.3 U5.5 U5.6
NetC3_1: C3.1 U1.6
NetC3_2: C3.2 D1.2 U1.8
NetC4_1: C4.1 U3.6
NetC4_2: C4.2 D2.2 U3.8
NetC6_1: C6.1 U4.6
NetC6_2: C6.2 D3.2 U4.8
NetD1_1: D1.1 R1.2
NetD2_1: D2.1 R4.2
NetD3_1: D3.1 R7.2
NetD4_1: D4.1 L1.1 U5.2
NetJ3_1: J3.1 R13.2 TP7.1 U2.14
NetJ3_2: J3.2 R14.2 TP8.1 U2.8
NetJ3_3: J3.3 R15.2 TP9.1 U2.7
NetLED1_1: LED1.1 TP3.1 U1.2 U2.1
NetLED1_2: LED1.2 R10.1
NetLED2_1: LED2.1 TP2.1 U2.2 U3.2
NetLED2_2: LED2.2 R11.1
NetLED3_1: LED3.1 TP1.1 U2.13 U4.2
NetLED3_2: LED3.2 R12.1
NetLED4_2: LED4.2 R16.2
NetLED5_2: LED5.2 R20.2
NetQ1_1: Q1.1 R2.2
NetQ1_4: Q1.4 R3.2
NetQ2_1: Q2.1 R5.2
NetQ2_4: Q2.4 R6.2
NetQ3_1: Q3.1 R8.2
NetQ3_4: Q3.4 R9.2
NetR2_1: R2.1 U1.7
NetR3_1: R3.1 U1.5
NetR5_1: R5.1 U3.7
NetR6_1: R6.1 U3.5
NetR8_1: R8.1 U4.7
NetR9_1: R9.1 U4.5
NetR17_1: R17.1 R18.2
NetR18_1: R18.1 R19.2 U5.4
NetR20_1: R20.1 R21.2
NetTP4_1: TP4.1 U1.3 U2.21
NetTP5_1: TP5.1 U2.6 U3.3
NetTP6_1: TP6.1 U2.9 U4.3
"PHASE A": J1.1 Q1.2 Q1.6 TP10.1
"PHASE B": J1.2 Q2.2 Q2.6 TP11.1
"PHASE C": J1.3 Q3.2 Q3.6 TP12.1
VBUS: C1.1 C11.1 C12.1 J2.1 LED4.1 Q1.5 Q2.5 Q3.5 U5.1
pads on no net: D1.3 D2.3 D3.3 U2.3 U2.5 U2.10 U2.11 U2.12 U2.15 U2.18 U2.20 U2.22 U2.23 U2.24 U2.25 U2.26 U2.27 U2.30

## Text inside footprints (layer, text, board x,y; h text height)
D4: Top Overlay "A" at 1726.46,782.95 h60